# EAGLE board FF0881SA1_BACK1 (EAGLE 9.6.2)
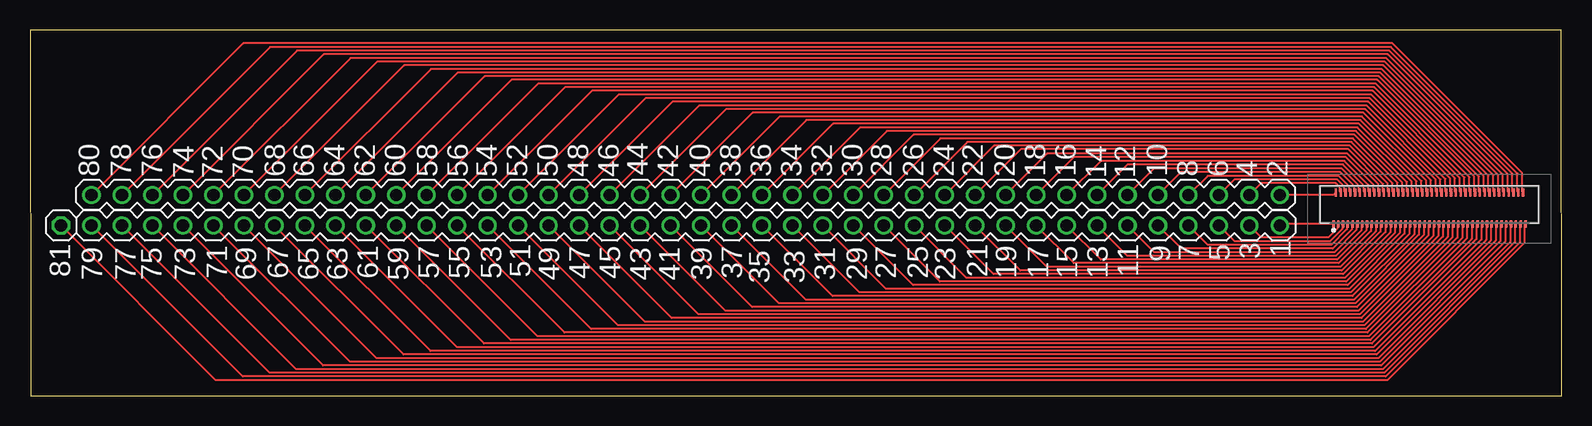
[diagram p0: board, top side]

Size 127.69 x 30.53 mm. Coordinates in mm from the lower left corner, seen from the top.
Outline: 0.05,0 127.69,0 127.64,30.53 0,30.53 0.05,0
Copper layers (1*16): Top 0.035mm / dielectric 1.5mm / Bottom 0.035mm
Design rules "default": minimum track width 6mil, minimum drill 0.35mm, track to track 6mil, track to pad 6mil, pad to pad 6mil, via to via 6mil, smd to smd 6mil, copper to edge 40mil, drill to drill 6mil, minimum pad ring 10mil, minimum via ring 8mil, stop-mask expansion 4mil, vias tented up to drill 0mil, thermal gap 10mil

## Footprints (pad centres in the part's own frame; a part is rotated, then mirrored left to right if it is on the bottom)
FF0881SA1R3000 = smd 0.18 x 0.55: 1 8,1.274; 3 7.6,1.274; 5 7.2,1.274; 7 6.8,1.274; 9 6.4,1.274; 11 6,1.274; 13 5.6,1.274; 15 5.2,1.274; 17 4.8,1.274; 19 4.4,1.274; 21 4,1.274; 23 3.6,1.274; 25 3.2,1.274; 27 2.8,1.274; 29 2.4,1.274; 31 2,1.274; 33 1.6,1.274; 35 1.2,1.274; 37 0.8,1.274; 39 0.4,1.274; 41 0,1.274; 43 -0.4,1.274; 45 -0.8,1.274; 47 -1.2,1.274; 49 -1.6,1.274; 51 -2,1.274; 53 -2.4,1.274; 55 -2.8,1.274; 57 -3.2,1.274; 59 -3.6,1.274; 61 -4,1.274; 63 -4.4,1.274; 65 -4.8,1.274; 67 -5.2,1.274; 69 -5.6,1.274; 71 -6,1.274; 73 -6.4,1.274; 75 -6.8,1.274; 77 -7.2,1.274; 79 -7.6,1.274; 81 -8,1.274 | smd 0.18 x 0.7: 2 7.8,-1.351; 4 7.4,-1.351; 6 7,-1.351; 8 6.6,-1.351; 10 6.2,-1.351; 12 5.8,-1.351; 14 5.4,-1.351; 16 5,-1.351; 18 4.6,-1.351; 20 4.2,-1.351; 22 3.8,-1.351; 24 3.4,-1.351; 26 3,-1.351; 28 2.6,-1.351; 30 2.2,-1.351; 32 1.8,-1.351; 34 1.4,-1.351; 36 1,-1.351; 38 0.6,-1.351; 40 0.2,-1.351; 42 -0.2,-1.351; 44 -0.6,-1.351; 46 -1,-1.351; 48 -1.4,-1.351; 50 -1.8,-1.351; 52 -2.2,-1.351; 54 -2.6,-1.351; 56 -3,-1.351; 58 -3.4,-1.351; 60 -3.8,-1.351; 62 -4.2,-1.351; 64 -4.6,-1.351; 66 -5,-1.351; 68 -5.4,-1.351; 70 -5.8,-1.351; 72 -6.2,-1.351; 74 -6.6,-1.351; 76 -7,-1.351; 78 -7.4,-1.351; 80 -7.8,-1.351
1X40 = drill 1.016: 1 -49.53,0; 2 -46.99,0; 3 -44.45,0; 4 -41.91,0; 5 -39.37,0; 6 -36.83,0; 7 -34.29,0; 8 -31.75,0; 9 -29.21,0; 10 -26.67,0; 11 -24.13,0; 12 -21.59,0; 13 -19.05,0; 14 -16.51,0; 15 -13.97,0; 16 -11.43,0; 17 -8.89,0; 18 -6.35,0; 19 -3.81,0; 20 -1.27,0; 21 1.27,0; 22 3.81,0; 23 6.35,0; 24 8.89,0; 25 11.43,0; 26 13.97,0; 27 16.51,0; 28 19.05,0; 29 21.59,0; 30 24.13,0; 31 26.67,0; 32 29.21,0; 33 31.75,0; 34 34.29,0; 35 36.83,0; 36 39.37,0; 37 41.91,0; 38 44.45,0; 39 46.99,0; 40 49.53,0
1X01 = drill 1.016 octagon: 1 0,0

## Placement (x,y rotation side)
J1  FF0881SA1-R3000  [FF0881SA1R3000]  116.66,15.62 180 top
JP1  [1X40]  54.66,16.76 180 top
JP2  [1X40]  54.66,14.22 0 top
JP3  [1X01]  2.59,14.22 0 top

## Library data of the parts
J1 = SamacSys_Parts; DESCRIPTION: FFC & FPC Connectors 81P 0.2MM FPC; HEIGHT: 1mm; MANUFACTURER_NAME: JAE Electronics; MANUFACTURER_PART_NUMBER: FF0881SA1-R3000; MOUSER_PART_NUMBER: 656-FF0881SA1-R3000; MOUSER_PRICE-STOCK: https://www.mouser.co.uk/ProductDetail/JAE-Electronics/FF0881SA1-R3000?qs=e3doH35UsB4mcpzu8vQ7Tw%3D%3D
JP1-JP3 = pinhead

## Nets
N$1: J1.1 JP2.40
N$2: J1.3 JP2.39
N$3: J1.5 JP2.38
N$4: J1.7 JP2.37
N$5: J1.9 JP2.36
N$6: J1.11 JP2.35
N$7: J1.13 JP2.34
N$8: J1.15 JP2.33
N$9: J1.17 JP2.32
N$10: J1.19 JP2.31
N$11: J1.21 JP2.30
N$12: J1.23 JP2.29
N$13: J1.2 JP1.1
N$14: J1.4 JP1.2
N$15: J1.6 JP1.3
N$16: J1.8 JP1.4
N$17: J1.10 JP1.5
N$18: J1.12 JP1.6
N$19: J1.14 JP1.7
N$20: J1.16 JP1.8
N$21: J1.18 JP1.9
N$22: J1.20 JP1.10
N$23: J1.22 JP1.11
N$24: J1.24 JP1.12
N$25: J1.26 JP1.13
N$26: J1.28 JP1.14
N$27: J1.30 JP1.15
N$28: J1.32 JP1.16
N$29: J1.34 JP1.17
N$30: J1.36 JP1.18
N$31: J1.38 JP1.19
N$32: J1.40 JP1.20
N$33: J1.42 JP1.21
N$34: J1.44 JP1.22
N$35: J1.25 JP2.28
N$36: J1.27 JP2.27
N$37: J1.29 JP2.26
N$38: J1.31 JP2.25
N$39: J1.33 JP2.24
N$40: J1.35 JP2.23
N$41: J1.37 JP2.22
N$42: J1.39 JP2.21
N$43: J1.41 JP2.20
N$44: J1.43 JP2.19
N$45: J1.46 JP1.23
N$46: J1.48 JP1.24
N$47: J1.50 JP1.25
N$48: J1.52 JP1.26
N$49: J1.54 JP1.27
N$50: J1.56 JP1.28
N$51: J1.58 JP1.29
N$52: J1.60 JP1.30
N$53: J1.62 JP1.31
N$54: J1.64 JP1.32
N$55: J1.66 JP1.33
N$56: J1.68 JP1.34
N$57: J1.70 JP1.35
N$58: J1.72 JP1.36
N$59: J1.74 JP1.37
N$60: J1.76 JP1.38
N$61: J1.78 JP1.39
N$62: J1.80 JP1.40
N$63: J1.45 JP2.18
N$64: J1.47 JP2.17
N$65: J1.49 JP2.16
N$66: J1.51 JP2.15
N$67: J1.53 JP2.14
N$68: J1.55 JP2.13
N$69: J1.57 JP2.12
N$70: J1.59 JP2.11
N$71: J1.61 JP2.10
N$72: J1.63 JP2.9
N$73: J1.65 JP2.8
N$74: J1.67 JP2.7
N$75: J1.69 JP2.6
N$76: J1.71 JP2.5
N$77: J1.73 JP2.4
N$78: J1.75 JP2.3
N$79: J1.77 JP2.2
N$80: J1.79 JP2.1
N$81: J1.81 JP3.1

## Tracks (layer width: path | path; a pad name or v marks a point on that pad's centre or on a via)
N$1
  Top 0.152: J1.1 104.31,14.35 JP2.40
N$2
  Top 0.152: J1.3 108.98,14.27 108.98,13.98 108.24,13.23 102.64,13.23 JP2.39
N$3
  Top 0.152: J1.5 109.38,14.27 109.38,13.95 108.34,12.9 100.43,12.9 JP2.38
N$4
  Top 0.152: J1.7 109.78,14.27 109.78,13.91 108.46,12.6 98.2,12.6 JP2.37
N$5
  Top 0.152: J1.9 110.18,14.27 110.18,13.88 108.59,12.29 95.96,12.29 JP2.36
N$6
  Top 0.152: J1.11 110.58,14.27 110.58,13.85 108.72,11.99 93.73,11.99 JP2.35
N$7
  Top 0.152: J1.13 110.98,14.27 110.98,13.82 108.84,11.68 91.49,11.68 JP2.34
N$8
  Top 0.152: J1.15 111.38,14.27 111.38,13.79 108.97,11.38 89.26,11.38 JP2.33
N$9
  Top 0.152: J1.17 111.78,14.27 111.78,13.76 109.1,11.07 87.02,11.07 JP2.32
N$10
  Top 0.152: J1.19 112.18,14.27 112.18,13.73 109.22,10.77 84.79,10.77 JP2.31
N$11
  Top 0.152: J1.21 112.58,14.27 112.58,13.7 109.35,10.46 82.55,10.46 JP2.30
N$12
  Top 0.152: J1.23 112.98,14.27 112.98,13.67 109.47,10.16 80.32,10.16 JP2.29
N$13
  Top 0.152: J1.2 108.65,16.76 JP1.1
N$14
  Top 0.152: J1.4 109.18,17.05 109.18,17.42 108.84,17.75 102.64,17.75 JP1.2
N$15
  Top 0.152: J1.6 109.58,17.05 109.58,17.45 108.97,18.06 100.41,18.06 JP1.3
N$16
  Top 0.152: J1.8 109.98,17.05 109.98,17.48 109.1,18.36 98.17,18.36 JP1.4
N$17
  Top 0.152: J1.10 110.38,17.05 110.38,17.51 109.22,18.67 95.94,18.67 JP1.5
N$18
  Top 0.152: J1.12 110.78,17.05 110.78,17.54 109.35,18.97 93.7,18.97 JP1.6
N$19
  Top 0.152: J1.14 111.18,17.05 111.18,17.57 109.45,19.3 91.49,19.3 JP1.7
N$20
  Top 0.152: J1.16 111.58,17.05 111.58,17.6 109.58,19.61 89.26,19.61 JP1.8
N$21
  Top 0.152: J1.18 111.98,17.05 111.98,17.63 109.7,19.91 87.02,19.91 JP1.9
N$22
  Top 0.152: J1.20 112.38,17.05 112.38,17.66 109.83,20.22 84.79,20.22 JP1.10
N$23
  Top 0.152: J1.22 112.78,17.05 112.78,17.7 109.9,20.57 82.6,20.57 JP1.11
N$24
  Top 0.152: J1.24 113.18,17.05 113.18,17.73 110.03,20.88 80.37,20.88 JP1.12
N$25
  Top 0.152: J1.26 113.58,17.05 113.58,17.76 110.16,21.18 78.13,21.18 JP1.13
N$26
  Top 0.152: J1.28 113.98,17.05 113.98,17.79 110.28,21.49 75.9,21.49 JP1.14
N$27
  Top 0.152: J1.30 114.38,17.05 114.38,17.82 110.41,21.79 73.66,21.79 JP1.15
N$28
  Top 0.152: J1.32 114.78,17.05 114.78,17.85 110.53,22.1 71.43,22.1 JP1.16
N$29
  Top 0.152: J1.34 115.18,17.05 115.18,17.88 110.66,22.4 69.19,22.4 JP1.17
N$30
  Top 0.152: J1.36 115.58,17.05 115.58,17.91 110.79,22.71 66.95,22.71 JP1.18
N$31
  Top 0.152: J1.38 115.98,17.05 115.98,17.95 110.91,23.01 64.72,23.01 JP1.19
N$32
  Top 0.152: J1.40 116.38,17.05 116.38,17.98 111.04,23.32 62.48,23.32 JP1.20
N$33
  Top 0.152: J1.42 116.78,17.05 116.78,18.01 111.17,23.62 60.25,23.62 JP1.21
N$34
  Top 0.152: J1.44 117.18,17.05 117.18,18.04 111.29,23.93 58.01,23.93 JP1.22
N$35
  Top 0.152: J1.25 113.38,14.27 113.38,13.64 109.6,9.86 78.08,9.86 JP2.28
N$36
  Top 0.152: J1.27 113.78,14.27 113.78,13.61 109.73,9.55 75.84,9.55 JP2.27
N$37
  Top 0.152: J1.29 114.18,14.27 114.18,13.57 109.85,9.25 73.61,9.25 JP2.26
N$38
  Top 0.152: J1.31 114.58,14.27 114.58,13.54 109.98,8.94 71.37,8.94 JP2.25
N$39
  Top 0.152: J1.33 114.98,14.27 114.98,13.51 110.11,8.64 69.14,8.64 JP2.24
N$40
  Top 0.152: J1.35 115.38,14.27 115.38,13.48 110.23,8.33 66.9,8.33 JP2.23
N$41
  Top 0.152: J1.37 115.78,14.27 115.78,13.45 110.36,8.03 64.67,8.03 JP2.22
N$42
  Top 0.152: J1.39 116.18,14.27 116.18,13.42 110.48,7.72 62.43,7.72 JP2.21
N$43
  Top 0.152: J1.41 116.58,14.27 116.58,13.39 110.61,7.42 60.2,7.42 JP2.20
N$44
  Top 0.152: J1.43 116.98,14.27 116.98,13.36 110.74,7.11 57.96,7.11 JP2.19
N$45
  Top 0.152: J1.46 117.58,17.05 117.58,18.07 111.42,24.23 55.78,24.23 JP1.23
N$46
  Top 0.152: J1.48 117.98,17.05 117.98,18.1 111.54,24.54 53.54,24.54 JP1.24
N$47
  Top 0.152: J1.50 118.38,17.05 118.38,18.13 111.67,24.84 51.31,24.84 JP1.25
N$48
  Top 0.152: J1.52 118.78,17.05 118.78,18.16 111.8,25.15 49.07,25.15 JP1.26
N$49
  Top 0.152: J1.54 119.18,17.05 119.18,18.19 111.92,25.45 46.84,25.45 JP1.27
N$50
  Top 0.152: J1.56 119.58,17.05 119.58,18.22 112.05,25.76 44.6,25.76 JP1.28
N$51
  Top 0.152: J1.58 119.98,17.05 119.98,18.25 112.18,26.06 42.37,26.06 JP1.29
N$52
  Top 0.152: J1.60 120.38,17.05 120.38,18.29 112.3,26.36 40.13,26.36 JP1.30
N$53
  Top 0.152: J1.62 120.78,17.05 120.78,18.32 112.43,26.67 37.9,26.67 JP1.31
N$54
  Top 0.152: J1.64 121.18,17.05 121.18,18.35 112.55,26.98 35.66,26.98 JP1.32
N$55
  Top 0.152: J1.66 121.58,17.05 121.58,18.38 112.68,27.28 33.43,27.28 JP1.33
N$56
  Top 0.152: J1.68 121.98,17.05 121.98,18.41 112.81,27.58 31.19,27.58 JP1.34
N$57
  Top 0.152: J1.70 122.38,17.05 122.38,18.44 112.93,27.89 28.96,27.89 JP1.35
N$58
  Top 0.152: J1.72 122.78,17.05 122.78,18.47 113.06,28.19 26.72,28.19 JP1.36
N$59
  Top 0.152: J1.74 123.18,17.05 123.18,18.5 113.19,28.5 24.49,28.5 JP1.37
N$60
  Top 0.152: J1.76 123.58,17.05 123.58,18.54 113.31,28.8 22.25,28.8 JP1.38
N$61
  Top 0.152: J1.78 123.98,17.05 123.98,18.57 113.44,29.11 20.02,29.11 JP1.39
N$62
  Top 0.152: J1.80 124.38,17.05 124.38,18.6 113.56,29.41 17.78,29.41 JP1.40
N$63
  Top 0.152: J1.45 117.38,14.27 117.38,13.32 110.86,6.81 55.73,6.81 JP2.18
N$64
  Top 0.152: J1.47 117.78,14.27 117.78,13.29 110.99,6.5 53.49,6.5 JP2.17
N$65
  Top 0.152: J1.49 118.18,14.27 118.18,13.26 111.12,6.2 51.26,6.2 JP2.16
N$66
  Top 0.152: J1.51 118.58,14.27 118.58,13.23 111.24,5.89 49.02,5.89 JP2.15
N$67
  Top 0.152: J1.53 118.98,14.27 118.98,13.2 111.37,5.59 46.79,5.59 JP2.14
N$68
  Top 0.152: J1.55 119.38,14.27 119.38,13.17 111.49,5.28 44.55,5.28 JP2.13
N$69
  Top 0.152: J1.57 119.78,14.27 119.78,13.14 111.62,4.98 42.32,4.98 JP2.12
N$70
  Top 0.152: J1.59 120.18,14.27 120.18,13.11 111.75,4.67 40.08,4.67 JP2.11
N$71
  Top 0.152: J1.61 120.58,14.27 120.58,13.08 111.87,4.37 37.85,4.37 JP2.10
N$72
  Top 0.152: J1.63 120.98,14.27 120.98,13.05 112,4.06 35.61,4.06 JP2.9
N$73
  Top 0.152: J1.65 121.38,14.27 121.38,13.02 112.13,3.76 33.38,3.76 JP2.8
N$74
  Top 0.152: J1.67 121.78,14.27 121.78,12.98 112.25,3.45 31.14,3.45 JP2.7
N$75
  Top 0.152: J1.69 122.18,14.27 122.18,12.95 112.38,3.15 28.91,3.15 JP2.6
N$76
  Top 0.152: J1.71 122.58,14.27 122.58,12.92 112.5,2.85 26.67,2.85 JP2.5
N$77
  Top 0.152: J1.73 122.98,14.27 122.98,12.89 112.63,2.54 24.44,2.54 JP2.4
N$78
  Top 0.152: J1.75 123.38,14.27 123.38,12.86 112.76,2.23 22.2,2.23 JP2.3
N$79
  Top 0.152: J1.77 123.78,14.27 123.78,12.83 112.88,1.93 19.96,1.93 JP2.2
N$80
  Top 0.152: J1.79 124.18,14.27 124.18,12.8 113.01,1.63 17.73,1.63 JP2.1
N$81
  Top 0.152: J1.81 124.58,14.27 124.58,12.77 113.14,1.32 15.49,1.32 JP3.1

## Text on the board
tPlace: 80 | 78 | 76 | 74 | 72 | 70 | 68 | 66 | 64 | 62 | 60 | 58 | 56 | 54 | 52 | 50 | 48 | 46 | 44 | 42 | 40 | 38 | 36 | 34 | 32 | 30 | 28 | 26 | 24 | 22 | 20 | 18 | 16 | 14 | 12 | 10 | 8 | 6 | 4 | 2 | 1 | 9 | 7 | 5 | 3 | 81 | 79 | 77 | 75 | 73 | 71 | 69 | 67 | 65 | 63 | 61 | 59 | 57 | 55 | 53 | 51 | 49 | 47 | 45 | 43 | 41 | 39 | 37 | 31 | 29 | 27 | 25 | 23 | 21 | 19 | 17 | 15 | 13 | 11 | 35 | 33